# Altium PCB PCBXL6009.PcbDoc
Units mil, origin at the board's own origin, x right, y up, seen from the top; angles counter-clockwise.
Board outline 2750 x 940 mil, 2 copper layers (Top Layer, Bottom Layer); 11 components, 5 nets, 30 pads, 0 vias.
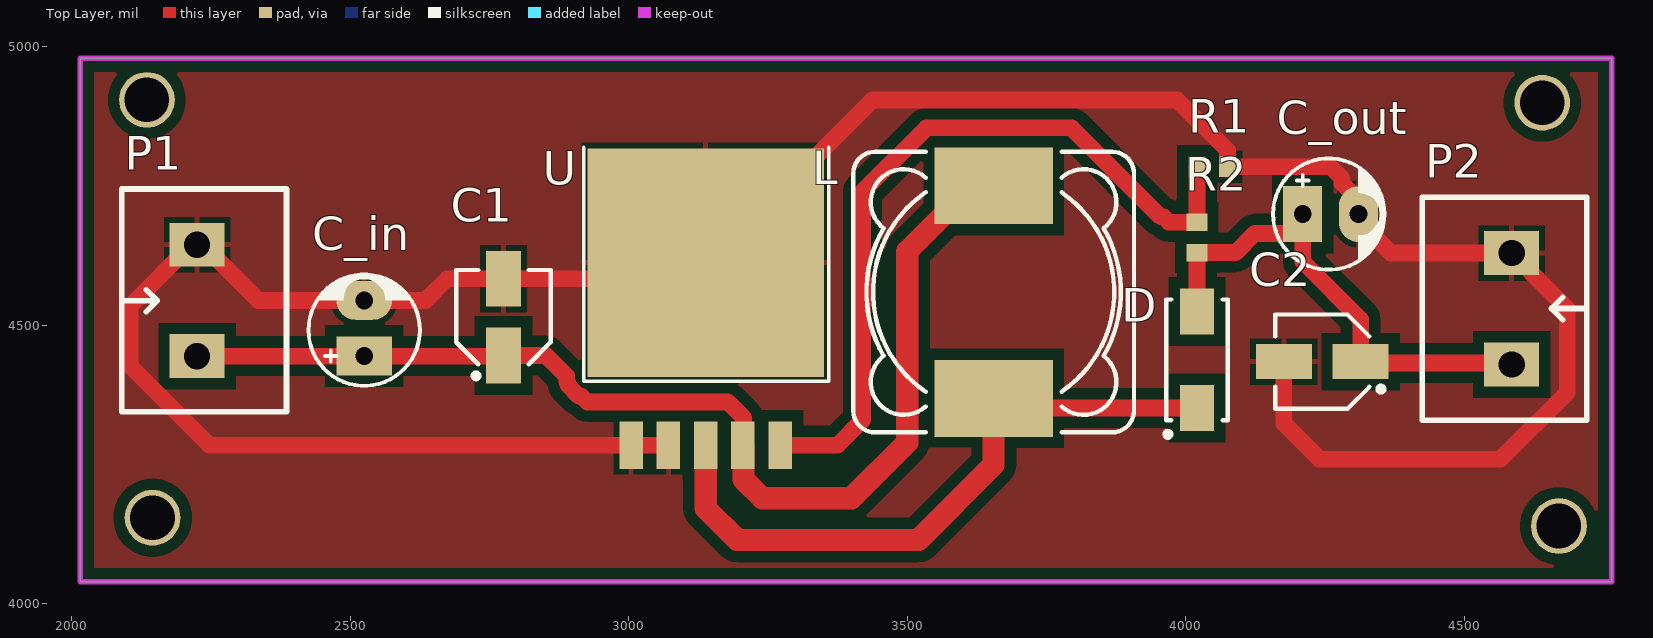
[diagram p0: Top Layer view]
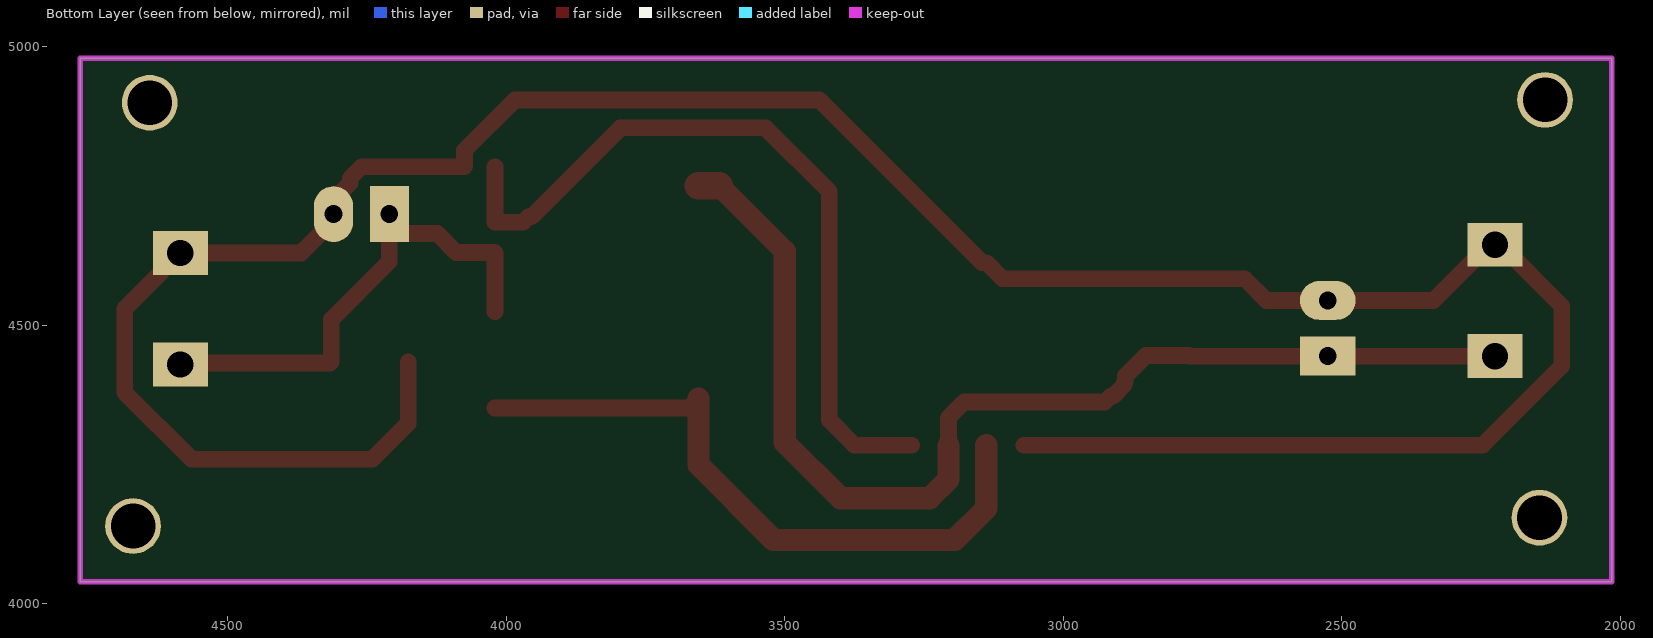
[diagram p1: Bottom Layer view, seen from below]
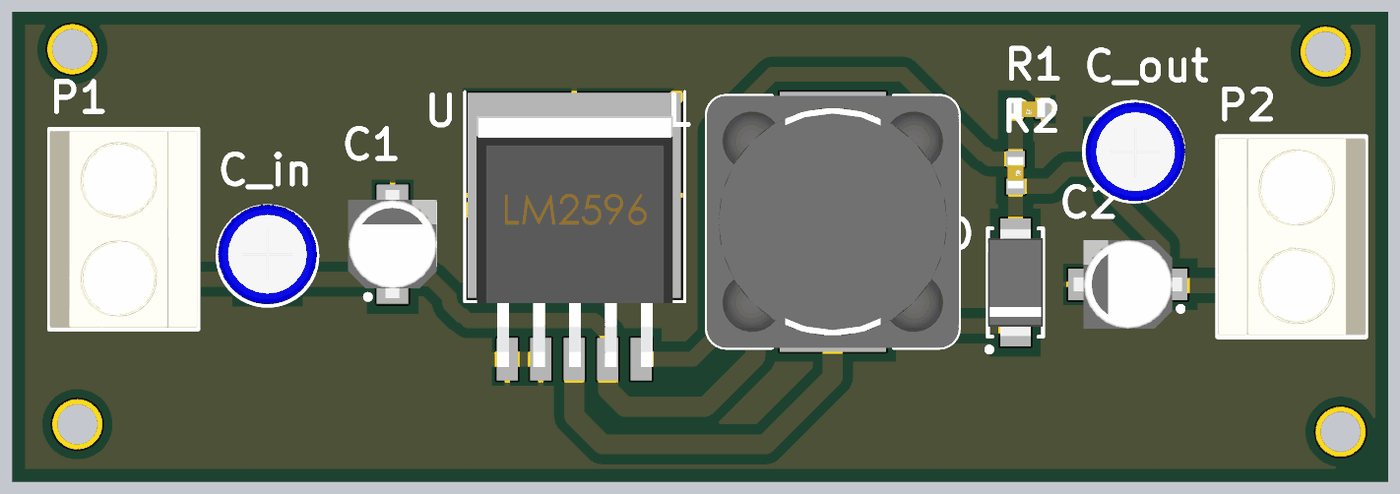
[diagram p2: 3D render of the assembled board from above, using the file's embedded part models]

## Layer stack, top to bottom
Top Solder: solder mask 0.4, Solder Resist, Dk 3.5
Top Layer: signal copper 1.4
Dielectric 1: dielectric 12.6, FR-4, Dk 4.8
Bottom Layer: signal copper 1.4
Bottom Solder: solder mask 0.4, Solder Resist, Dk 3.5

## Board outline
2015,4040 4765,4040 4765,4980 2015,4980

## Design rules (kind name [scope] priority, off if disabled: settings)
Clearance [All] p1: gap=20 ignorepadtopadclearanceinfootprint=FALSE
PolygonConnect [All] p1: connectstyle=Relief reliefconductorwidth=10 reliefentries=4 polygonreliefangle="90 Angle" airgapwidth=10
RoutingVias [All] p1: holewidth=28 width=50 viastyle="Through Hole" minholewidth=28 minwidth=50 maxholewidth=28 maxwidth=50
SolderMaskExpansion [All] p1: expansion=4 istentingtop=FALSE
Width [All] p1: maxlimit=50 minlimit=15 preferedwidth=30 toplayer_maxwidth=40 minimp=50.000000 maximp=50.000000 favimp=50.000000
30 further rules are at their usual default settings.

## Components (designator, comment, footprint, x,y, rotation, side; value= is the part's Value field where it differs from the comment)
C1 "Cap Pol SMD" "CAP ALU SIZE B" 2775,4515 r90 top value=105
C2 "Cap Pol SMD" "CAP ALU SIZE B" 4245,4435 r180 top value=105
C_in "Cap Pol" CP1/2 2525,4445 r90 top value=47uF/50V
C_out "Cap Pol" CP1/2 4210,4700 r0 top value=220uF/50V
D "D Schottky" SS34 4020,4438.39 r90 top
L "Inductor" "INDUCTOR 12.5x12.5" 3655,4560 r270 top value=33uH/4A
P1 "Domino 2" "DOMINO 2- 5mm" 2225,4545 r90 top
P2 "Domino 2" "DOMINO 2- 5mm" 4585,4530 r270 top
R1 "RESISTOR SMD" RES-SM-0603 4075,4785 r180 top value=1K
R2 "RESISTOR SMD" RES-SM-0603 4020,4685 r270 top value=13.8K
U "XL6009" LM2596 3004.21,4285 r0 top

## Footprints (in the part's own frame and the unit in brackets; to place one, negate y for a bottom-side part, rotate by r counter-clockwise, add the part's x,y. Pads: shape width x height; smd on the part's side, far side on the other; paste and mask are expansions set on the pad)
"CAP ALU SIZE B" [mm] "Capacitor, Aluminium Electrolytric, 4.3mm L X 4.3mm W X 5.4mm H, IPC Medium Density"
  rect 2.55x1.6 smd: 1(-1.75,0) 2(1.75,0)
  silkscreen extent -2.8,-2.15 2.15,2.15, body extent -2.75,-2.25 2.75,2.25, height 5.7
CP1/2 [mil] "Tu hoa < 22uF/16>50V"
  rect 70x100 hole 32: 1(0,0)
  oval 70x100 hole 32: 2(100,0)
  silkscreen extent -53,-100 146,100, body extent -49,-99 149,99, height 287
"DOMINO 2- 5mm" [mm]
  rect 2x2.5 hole 1.2: 1(-2.54,0) 2(2.54,0)
  silkscreen extent -5.08,-4.08 5.08,3.43, body extent -5,-4.07 5,3.43, height 10
"INDUCTOR 12.5x12.5" [mm] "SMD Inductor  Body Width 12.5mm Body Lenght 12.5mm Height 8mm"
  rect 3.5x5.4 smd: 1(-4.85,0) 2(4.85,0)
  silkscreen extent -6.4,-6.4 6.4,6.4, body extent -6.4,-6.4 6.4,6.4, height 8
LM2596 [mm]
  rect 1.07x2.16 smd: 1(0,0) 2(1.7,0) 3(3.4,0) 4(5.1,0) 5(6.8,0)
  rect 10.8x10.41 smd: 6(3.4,8.325)
  silkscreen extent -2.16,2.92 9.02,13.59, body extent -1.57,-0.39 8.43,12.36, height 4.3
RES-SM-0603 [mm]
  rect 0.8x0.95 smd: 1(-0.014,0) 2(1.386,0)
  body extent -0.11,-0.4 1.49,0.4, height 0.3
SS34 [mm] "DO-214-AC/SMA Molded Diode, Body 5.3x2.6mm, IPC Medium Density"
  rect 2.1x1.55 smd: 1(-2.2,0) 2(2.2,0)
  silkscreen extent -3.52,-1.4 2.75,1.45, body extent -2.75,-1.4 2.75,1.4, height 2.3

## Part data
C1 C2 C_in C_out: "Polarized Capacitor (Radial)"
D: "Schottky Diode", Code_JEDEC=DO-214-AA, LatestRevisionDate=17-Jul-2002, LatestRevisionNote="Re-released for DXP Platform.", PackageDescription="DO-214-AA/SMB; 2 C-Bend Leads; Body 5.3 x 3.6 mm, inc. leads (LxW)", PackageReference=SMB, Published=8-Jun-2000, Publisher="Altium Limited"
P1 P2: "Domino, 2-Pin", LatestRevisionDate=17-Jul-2002, LatestRevisionNote="Re-released for DXP Platform.", Publisher="Altium Limited"
R1 R2: "Resistor"
U: "SMD"

## Free pads (board coordinates)
  round 100 hole 80: 4(2145,4155) 4(4640,4900) 4(4670,4140) 6(2135,4905)

## Nets (pads, with @x,y where several pads share a name; then routed paths per layer and width w, separated by ;. In a path a pad name is that pad's centre, name@x,y a point inside that pad or via, vN(x,y) a via of type N, cw(c..) or ccw(c..) an arc to the next point about the centre after c; other vN are vias at no path point)
GND: C1.2 C2.2 C_in.2 C_out.2 P1.2 P2.1 R1.1 U.1 U.2 U.6 | length 5000.2
  Top Layer w30: U.2 U.1 2246.92,4285 2105,4426.92 2105,4515 2105,4534.84 2215.16,4645 P1.2 2234.84,4645 2334.84,4545 C_in.2 2635.22,4545 2674.11,4583.9 C1.2 3109.21,4583.9 U.6 3145.75,4612.76 3437.83,4904.84 3984.54,4904.84 4074.81,4814.58 4074.81,4785.75 R1.1 4259.5,4785 4280,4764.5 4280,4755.82 4310,4725.82 C_out.2 4310,4688.14 4368.14,4630 P2.1 4594.84,4630 4619.21,4605.63 4619.21,4595.79 4685,4530 4685,4380 4565,4260 4240,4260 4176.1,4323.9 C2.2
NetC1_1: C1.1 C_in.1 L.1 P1.1 U.4 | length 2042.4
  Top Layer w30: P1.1 C_in.1 2773.9,4445 C1.1 2851.5,4446.1 2888.48,4409.12 2888.48,4399.5 2890.47,4397.51 2890.47,4393.34 2910.97,4372.83 2915.15,4372.83 2925.46,4362.52 3177.8,4362.52 3205.87,4334.46 3205.87,4285.87 U.4
  Top Layer w40: U.4@3205.87,4284.13 3205.87,4223.84 3239.71,4190 3400,4190 3500,4290 3500,4633.35 L.1@3617.6,4750.94
  Top Layer w50: L.1@3617.6,4750.94 L.1
NetC2_1: C2.1 C_out.1 D.2 P2.2 R2.2 | length 914.2
  Top Layer w30: D.2 R2.2 4020.75,4631.19 4089.95,4631.19 4123.76,4665 4190,4665 4210,4685 C_out.1 4210,4615 4313.9,4511.1 C2.1 4316.4,4432.5 4582.5,4432.5 P2.2
NetD_1: D.1 L.2 U.3 | length 1200.7
  Top Layer w30: L.2 3672.28,4351.77 D.1
  Top Layer w40: U.3 3138.07,4171.93 3195,4115 3520,4115 3655,4250 3655,4351.77 L.2
NetR1_2: R1.2 R2.1 U.5 | length 1394.4
  Top Layer w30: U.5 3375,4285 3420,4330 3420,4740.64 3534.2,4854.84 3795.16,4854.84 3955,4695 3960,4695 3969.44,4685.56 R2.1 4020.22,4685.78 4020.22,4784.78 R1.2

## Polygon pours and split planes (outlines as drawn)
GND on Top Layer "GND_L01_P000" (solid, pour order 0): 2020,4980 2025,4985 4770,4985 4770,4035 4765,4040 2015,4040

## Keep-outs
Keep-Out Layer:
  the board outline again, w10